# EAGLE board Red Buggy 2015 (EAGLE 7.2.0)

Size 100 x 80 mm. Coordinates in mm from the lower left corner, seen from the top.
Outline: 0,0 100,0 100,80 0,80 0,0
Copper layers (1*16): Top 0.035mm / dielectric 1.5mm / Bottom 0.035mm
Design rules "default": minimum track width 10mil, minimum drill 24mil, track to track 8mil, track to pad 8mil, pad to pad 8mil, via to via 8mil, smd to smd 8mil, copper to edge 40mil, drill to drill 8mil, minimum pad ring 10mil, minimum via ring 8mil, stop-mask expansion 4mil, vias tented up to drill 0mil, thermal gap 10mil

## Footprints (pad centres in the part's own frame; a part is rotated, then mirrored left to right if it is on the bottom)
DO201-15 = drill 1.499 long: A 7.62,0; C -7.62,0
B3F-31XX = drill 1.016 pad 1.778 octagon: 1 -2.261,-1.245; 2 2.261,-1.245 | drill 1.499 pad 2.54: 3 -3.505,1.245; 4 3.505,1.245
FUSE1 = drill 1.194 long: 1A -10.16,0; 1B -5.08,0; 2A 10.16,0; 2B 5.08,0
2X12 = drill 1.016 octagon: 1 -13.97,-1.27; 2 -13.97,1.27; 3 -11.43,-1.27; 4 -11.43,1.27; 5 -8.89,-1.27; 6 -8.89,1.27; 7 -6.35,-1.27; 8 -6.35,1.27; 9 -3.81,-1.27; 10 -3.81,1.27; 11 -1.27,-1.27; 12 -1.27,1.27; 13 1.27,-1.27; 14 1.27,1.27; 15 3.81,-1.27; 16 3.81,1.27; 17 6.35,-1.27; 18 6.35,1.27; 19 8.89,-1.27; 20 8.89,1.27; 21 11.43,-1.27; 22 11.43,1.27; 23 13.97,-1.27; 24 13.97,1.27
CB1 = drill 2.3: 30 8.95,0; 85 -0.55,-8.4; 86 -0.55,8.4; 87 -8.95,0; 87A -0.95,0
320-916 = drill 2.007 long: 1 0,4.013; 2 0,0; 3 0,-4.013

## Placement (x,y rotation side)
D1  1N5624  [DO201-15]  -44.45,48.26 0 top  (outside the outline)
E-STOP  [B3F-31XX]  -29.21,49.53 0 top  (outside the outline)
F1  [FUSE1]  -25.4,26.67 0 top  (outside the outline)
FRAME1  FRAME-LETTER  [CREATIVE_COMMONS]  -54.61,-15.24 0 top  (outside the outline)
IGNITION  [B3F-31XX]  -45.72,40.64 0 top  (outside the outline)
INTERLOCK  [B3F-31XX]  -46.99,27.94 0 top  (outside the outline)
JP1  [2X12]  36.83,46.99 0 top
JP2  [2X12]  -60.96,-5.08 0 top  (outside the outline)
K1  CB1A-P-12V  [CB1]  -25.4,11.43 0 top  (outside the outline)
K2  CB1A-P-12V  [CB1]  -50.8,11.43 0 top  (outside the outline)
MODE-L  [B3F-31XX]  -19.05,49.53 0 top  (outside the outline)
MODE-R  [B3F-31XX]  -57.15,40.64 0 top  (outside the outline)
S1  [320-916]  -72.39,10.16 0 top  (outside the outline)

## Library data of the parts
D1 = diode
E-STOP IGNITION INTERLOCK MODE-L MODE-R = adafruit
F1 = special
FRAME1 = SparkFun-Aesthetics
JP1 JP2 = pinhead
K1 K2 = relay; MF: AROMAT/ MATSUSHITA; MPN: CB1A-P-12V; OC_FARNELL: 1270582; OC_NEWARK: 50B849
S1 = switch

## Nets
36V: IGNITION.2 INTERLOCK.1 JP1.1 JP1.2 JP1.9 JP2.1 JP2.2 JP2.9 K1.30 K1.85 K2.30 K2.85 MODE-L.1 MODE-R.1 S1.2
CON1: JP1.17 K1.87
CON2: JP2.17 K2.87
FWD: JP1.10 JP2.10 S1.3
GND: JP1.15 JP2.15 K1.86 K2.86
ILOCK: INTERLOCK.2 JP1.8 JP2.8
MS1: JP1.4 JP2.4 MODE-L.2
MS2: JP1.3 JP2.3 MODE-R.2
N$1: D1.A F1.2A
N$2: E-STOP.2 F1.1A
N$3: D1.C IGNITION.1
REV: JP1.11 JP2.11 S1.1
V+: E-STOP.1

## Tracks (layer width: path | path; a pad name or v marks a point on that pad's centre or on a via)
36V  (14 unrouted)
CON1  (1 unrouted)
CON2  (1 unrouted)
FWD  (2 unrouted)
GND  (3 unrouted)
ILOCK  (2 unrouted)
MS1  (2 unrouted)
MS2  (2 unrouted)
N$1  (1 unrouted)
N$2  (1 unrouted)
N$3  (1 unrouted)
REV  (2 unrouted)